# Altium PCB MiniFrogFC_v1.PcbDoc
Units mm, origin at the board's own origin, x right, y up, seen from the top; angles counter-clockwise.
Board outline 26.73 x 18 mm, 4 copper layers (Top Layer, Middle Layer 1, Middle Layer 2, Bottom Layer), stack 0.568 mm thick; 86 components, 49 nets, 293 pads, 42 vias.
Unrouted connection lines stored in the file: 2.
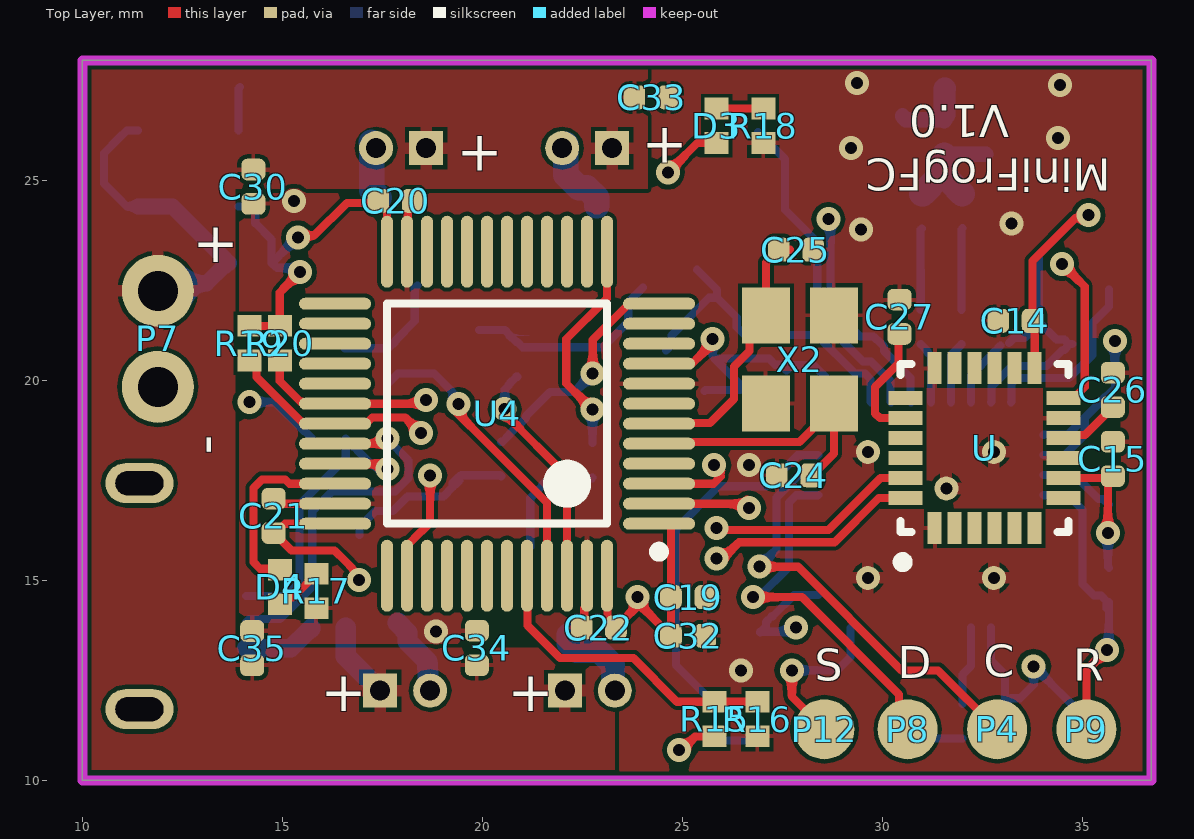
[diagram p0: Top Layer view]
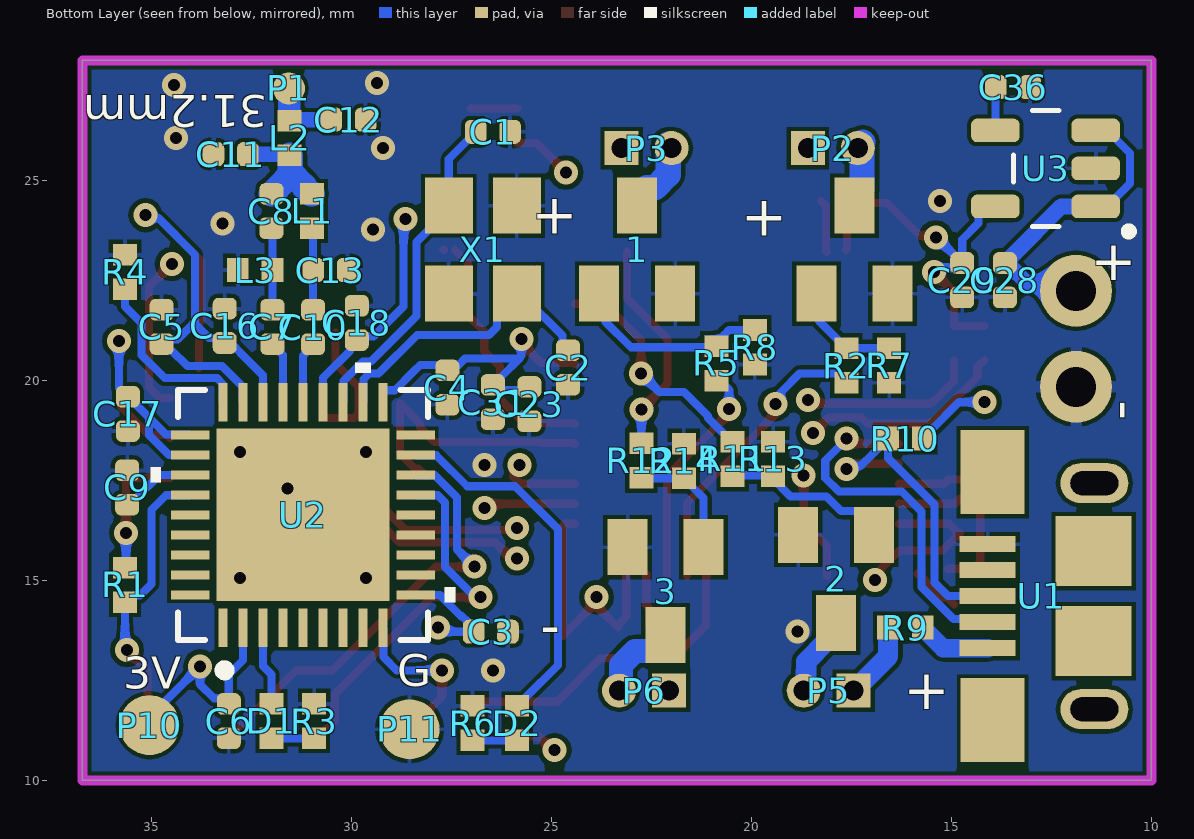
[diagram p1: Bottom Layer view, seen from below]
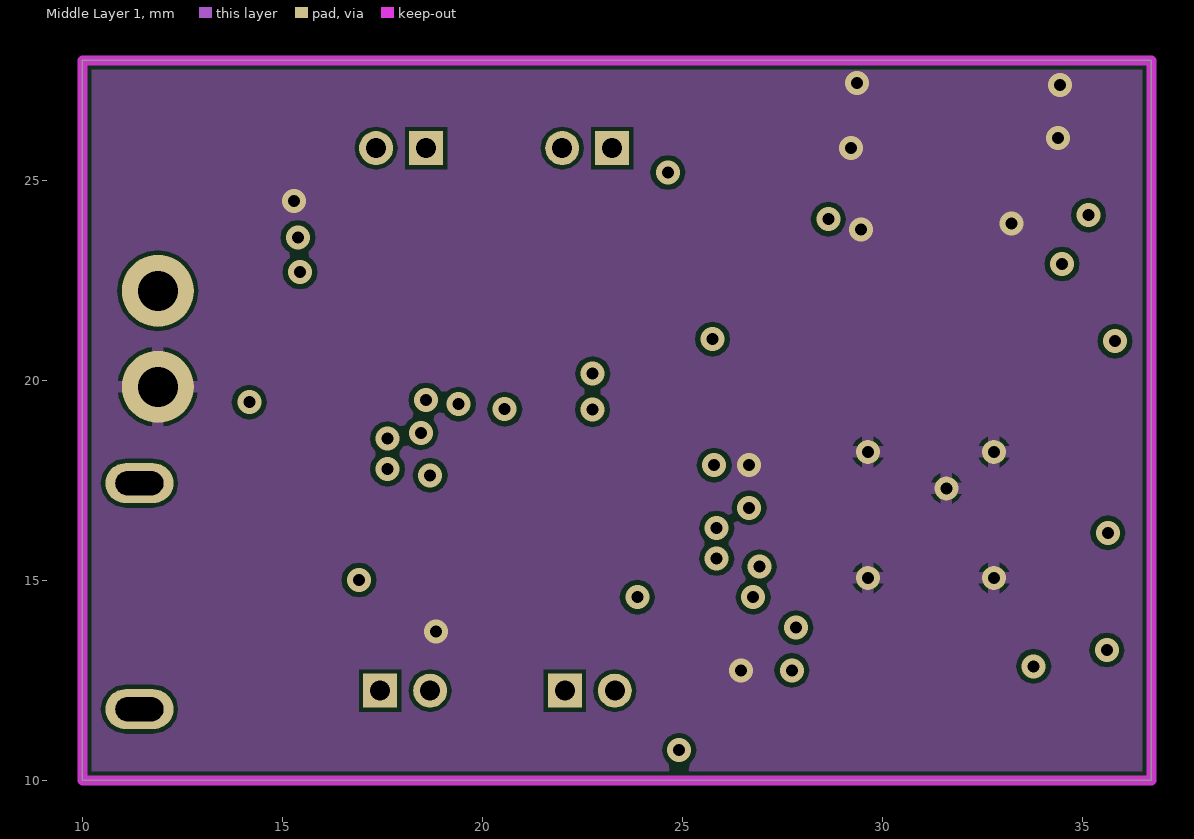
[diagram p2: Middle Layer 1]
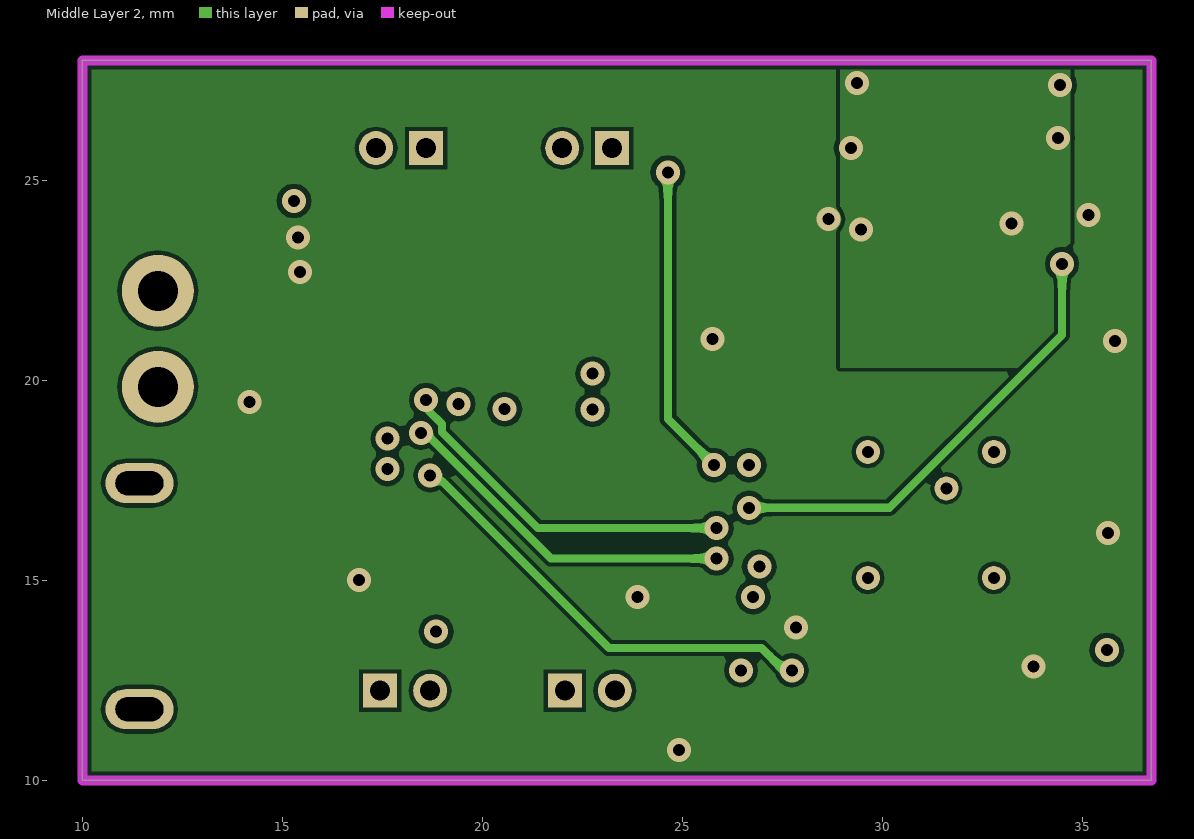
[diagram p3: Middle Layer 2]
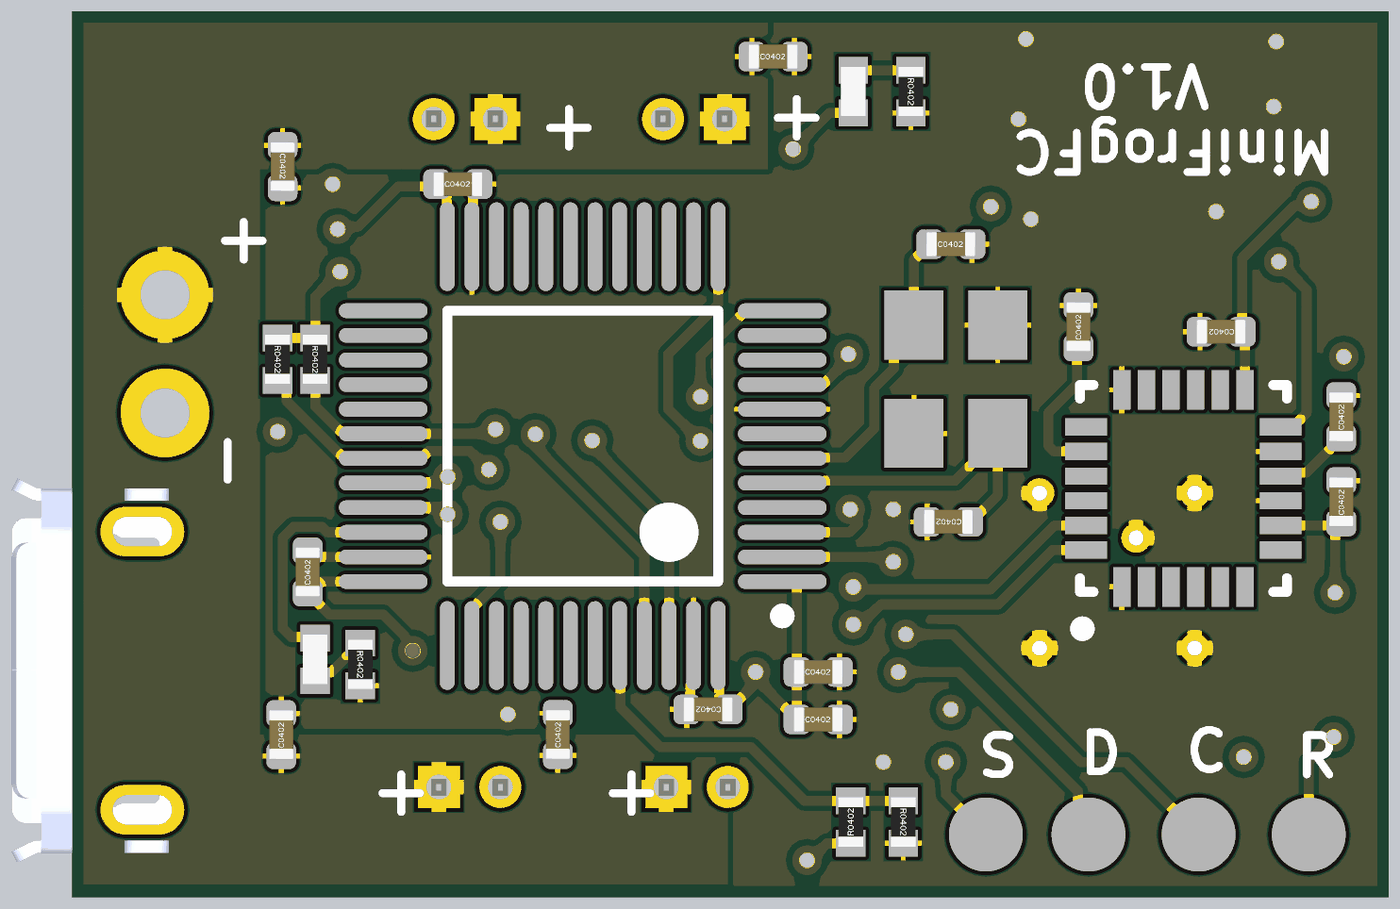
[diagram p4: 3D render of the assembled board from above, using the file's embedded part models]
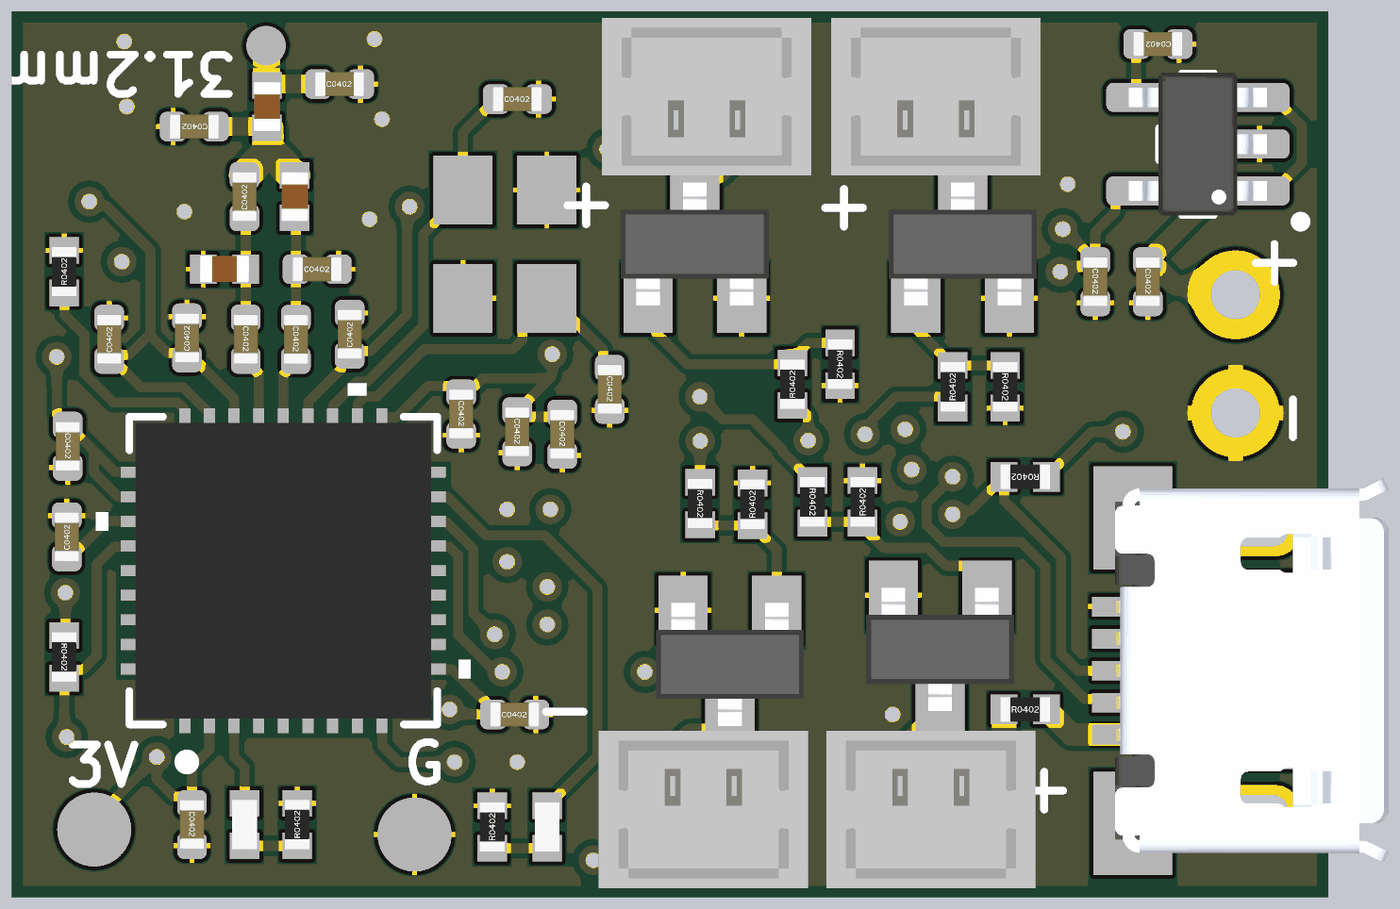
[diagram p5: 3D render of the assembled board from below, using the file's embedded part models]

## Layer stack, top to bottom
Top Solder: solder mask 0.0102, Solder Resist, Dk 3.5
Top Layer: signal copper 0.0356
Dielectric 2: prepreg 0.0711, PP-006, Dk 4.1
Middle Layer 1: signal copper 0.0175
Dielectric 1: core 0.32, FR-4, Dk 4.8
Middle Layer 2: signal copper 0.0175
Dielectric 3: prepreg 0.0711, PP-006, Dk 4.1
Bottom Layer: signal copper 0.0356
Bottom Solder: solder mask 0.0102, Solder Resist, Dk 3.5

## Board outline
10,10 36.728,10 36.728,28 10,28

## Design rules (kind name [scope] priority, off if disabled: settings)
BoardOutlineClearance [All] p1: gap=0.2 ignorepadtopadclearanceinfootprint=FALSE
Clearance [All] p1: gap=0.102 ignorepadtopadclearanceinfootprint=FALSE except(0.127: Arc-Via Track-Via SMDPad-Via THPad-Via Via-Via Via-Fill Via-Poly Via-Region Via-Text; 0.25: Arc-Hole Track-Hole SMDPad-Hole THPad-Hole Via-Hole Fill-Hole Poly-Hole Region-Hole Text-Hole)
ComponentClearance [All] p1: gap=0.102 collisioncheckmode=3 verticalgap=0.102 showdistances=TRUE
DiffPairsRouting [All] p1: maxlimit=0.102 minlimit=0.102 mostfreqgap=0.102 toplayer_minwidth=0.102 toplayer_maxwidth=1816.048 toplayer_prefwidth=0.102 midlayer1_minwidth=0.102 midlayer1_maxwidth=1816.048 midlayer1_prefwidth=0.102 midlayer2_minwidth=0.102 midlayer2_maxwidth=1816.048 midlayer2_prefwidth=0.102 bottomlayer_minwidth=0.102 bottomlayer_maxwidth=1816.048 bottomlayer_prefwidth=0.102 maxuncoupledlength=12.7
Height [All] p1: minheight=0 maxheight=1816.048 prefheight=12.7
HoleSize [All] p1: absolutevalues=TRUE maxlimit=6.3 minlimit=0.2 maxpercent=80.000 minpercent=20.000
HoleToHoleClearance [All] p1: gap=0.25 allowstackedmicrovias=FALSE
MinimumAnnularRing [All] p1: minimumring=0.076
MinimumSolderMaskSliver [All] p1: minsoldermaskwidth=0
PlaneClearance [All] p1: clearance=0.102
PlaneConnect PlaneConnectPowerPads [InPadClass('PowerPads')] p1: planeconnectstyle=Direct reliefexpansion=0.508 reliefentries=4 reliefconductorwidth=0.254 reliefairgap=0.254
PlaneConnect [All] p2: pad.planeconnectstyle=Relief pad.reliefexpansion=0.3 pad.reliefentries=4 pad.reliefconductorwidth=0.102 pad.reliefairgap=0.102 via.planeconnectstyle=Direct via.reliefexpansion=0.3 via.reliefentries=4 via.reliefconductorwidth=0.127 via.reliefairgap=0.127
PolygonConnect PolygonConnectPowerPads [All vs (InPadClass('PowerPads'))] p1: connectstyle=Direct reliefconductorwidth=0.254 reliefentries=4 polygonreliefangle="90 Angle" airgapwidth=0.254
PolygonConnect [All] p2: thpad.connectstyle=Relief thpad.reliefconductorwidth=0.3 thpad.reliefentries=4 thpad.polygonreliefangle="90 Angle" thpad.airgapwidth=0.102 smdpad.connectstyle=Relief smdpad.reliefconductorwidth=0.102 smdpad.reliefentries=4 smdpad.polygonreliefangle="90 Angle" smdpad.airgapwidth=0.102 via.connectstyle=Direct via.reliefconductorwidth=0.127 via.reliefentries=4 via.polygonreliefangle="90 Angle" via.airgapwidth=0.127
RoutingVias [All] p1: holewidth=0.2 width=0.45 viastyle="Through Hole" minholewidth=0.2 minwidth=0.45 maxholewidth=6.3 maxwidth=6.55
SilkToSilkClearance [All] p1: silktosilkclearance=0
SilkToSolderMaskClearance [IsPad] p1: minsilkscreentomaskgap=0.102 clearancetoexposedcopper=TRUE
SolderMaskExpansion [All] p1: expansion=0.075 istentingtop=FALSE
Width [All] p1: maxlimit=1816.048 minlimit=0.102 preferedwidth=0.102
20 further rules are at their usual default settings.

## Classes and differential pairs
component class Receiver: C1 C2 C3 C4 C5 C6 C7 C8 C9 C10 C11 C12 C13 C16 C17 C18 D1 D2 L1 L2 L3 P1 P4 P8 P9 P10 P11 P12 R1 R3 R4 R6 U2 X1
component class Power: C28 C29 C30 C33 C34 C35 C36 P7 U3
component class MCU: 1 2 3 C19 C20 C21 C22 C23 C24 C25 C31 C32 D3 D4 P2 P3 P5 P6 R2 R5 R7 R8 R9 R10 R11 R12 R13 R14 R15 R16 R17 R18
component class IMU: C14 C15 C26 C27 R19 R20 U

## Components (designator, comment, footprint, x,y, rotation, side; value= is the part's Value field where it differs from the comment)
1 "AO3416" SOT23-3 22.86,23.266 r180 bottom
2 "AO3416" SOT23-3 17.882,15.037 r0 bottom
3 "AO3416" SOT23-3 22.149,14.732 r0 bottom
C1 "12pF" "0402 Capacitor Generic" 26.464,26.213 r180 bottom
C2 "12pF" "0402 Capacitor Generic" 24.587,20.32 r270 bottom
C3 "100nF" "0402 Capacitor Generic" 26.518,13.716 r180 bottom
C4 "220pF" "0402 Capacitor Generic" 27.603,19.818 r270 bottom
C5 "220pF" "0402 Capacitor Generic" 34.747,21.336 r90 bottom
C6 "1uF" "0402 Capacitor Generic" 33.068,11.481 r270 bottom
C7 "100pF" "0402 Capacitor Generic" 31.976,21.336 r270 bottom
C8 "1pF" "0402 Capacitor Generic" 32.001,24.232 r90 bottom
C9 "1uF" "0402 Capacitor Generic" 35.608,17.323 r90 bottom
C10 "100pF" "0402 Capacitor Generic" 30.96,21.334 r270 bottom
C11 "1p8" "0402 Capacitor Generic" 33.02,25.654 r0 bottom
C12 "1p5" "0402 Capacitor Generic" 30.074,26.518 r180 bottom
C13 "1pF" "0402 Capacitor Generic" 30.528,22.758 r180 bottom
C14 "0.1uF" "0402 Capacitor Generic" 33.325,21.488 r180 top
C15 "10nF" "0402 Capacitor Generic" 35.763,18.034 r90 top
C16 "100nF" "0402 Capacitor Generic" 33.17,21.364 r90 bottom
C17 "100nF" "0402 Capacitor Generic" 35.59,19.162 r270 bottom
C18 "100nF" "0402 Capacitor Generic" 29.868,21.438 r90 bottom
C19 "100nF" "0402 Capacitor Generic" 25.146,14.58 r0 top
C20 "100nF" "0402 Capacitor Generic" 17.831,24.486 r0 top
C21 "100nF" "0402 Capacitor Generic" 14.783,16.612 r90 top
C22 "100nF" "0402 Capacitor Generic" 22.911,13.818 r180 top
C23 "10nF" "0402 Capacitor Generic" 25.552,19.406 r270 bottom
C24 "20 pF" "0402 Capacitor Generic" 27.788,17.628 r180 top
C25 "20pF" "0402 Capacitor Generic" 27.838,23.266 r0 top
C26 "0.1uF" "0402 Capacitor Generic" 35.763,19.761 r90 top
C27 "2.2nF" "0402 Capacitor Generic" 30.429,21.59 r90 top
C28 "1uF" "0402 Capacitor Generic" 13.665,22.504 r270 bottom
C29 "4.7uF" "0402 Capacitor Generic" 14.732,22.504 r270 bottom
C30 "10u" "0402 Capacitor Generic" 14.275,24.841 r270 top
C31 "1uF" "0402 Capacitor Generic" 26.467,19.456 r270 bottom
C32 "4.7uF" "0402 Capacitor Generic" 25.146,13.614 r0 top
C33 "10u" "0402 Capacitor Generic" 24.232,27.076 r0 top
C34 "10u" "0402 Capacitor Generic" 19.863,13.31 r90 top
C35 "10u" "0402 Capacitor Generic" 14.247,13.305 r90 top
C36 "0.01uF" "0402 Capacitor Generic" 13.462,27.33 r0 bottom
D1 "Green LED" "0402 LED Generic" 32.001,11.481 r90 bottom
D2 "Red LED" "0402 LED Generic" 25.857,11.43 r90 bottom
D3 "LED" "0402 LED Generic" 25.857,26.365 r270 top
D4 "LED" "0402 LED Generic" 14.935,14.834 r90 top
L1 "1.2nH" "0402 Inductor Generic" 30.985,24.232 r90 bottom
L2 "1.2nH" "0402 Inductor Generic" 31.547,26.06 r90 bottom
L3 "1.2nH" "0402 Inductor Generic" 32.408,22.758 r0 bottom
P1 "RX antenna" "Antenna pad" 31.565,27.297 r180 bottom
P2 "Motor_out" MOLEX_530470210 17.968,25.806 r0 bottom
P3 "Motor_out" MOLEX_530470210 22.621,25.806 r0 bottom
P4 "RX Output_Single" "1 Solder Pad" 32.868,11.278 r0 top
P5 "Motor_out" MOLEX_530470210 18.069,12.243 r180 bottom
P6 "Motor_out" MOLEX_530470210 22.686,12.243 r180 bottom
P7 "Batt_in" "2 Solder Pads" 11.887,21.039 r0 top
P8 "RX Output_Single" "1 Solder Pad" 30.632,11.278 r0 top
P9 "RX Output_Single" "1 Solder Pad" 35.103,11.278 r0 top
P10 "RX Output_Single" "1 Solder Pad" 35.052,11.379 r90 bottom
P11 "RX Output_Single" "1 Solder Pad" 28.55,11.278 r180 bottom
P12 "RX Output_Single" "1 Solder Pad" 28.55,11.278 r90 top
R1 "10k" "0402 Resistor Generic" 35.662,14.884 r270 bottom
R2 "100R" "0402 Resistor Generic" 17.628,20.371 r90 bottom
R3 "1k" "0402 Resistor Generic" 30.934,11.481 r90 bottom
R4 "56k" "0402 Resistor Generic" 35.662,22.708 r90 bottom
R5 "100R" "0402 Resistor Generic" 20.879,20.422 r90 bottom
R6 "1k" "0402 Resistor Generic" 26.975,11.43 r90 bottom
R7 "10k" "0402 Resistor Generic" 16.561,20.371 r270 bottom
R8 "10k" "0402 Resistor Generic" 19.914,20.828 r270 bottom
R9 "DNP" "0402 Resistor Generic" 16.154,13.818 r180 bottom
R10 "1k5" "0402 Resistor Generic" 16.154,18.542 r0 bottom
R11 "100R" "0402 Resistor Generic" 20.472,18.034 r270 bottom
R12 "100R" "0402 Resistor Generic" 22.754,17.999 r270 bottom
R13 "10k" "0402 Resistor Generic" 19.456,18.034 r90 bottom
R14 "10k" "0402 Resistor Generic" 21.692,17.983 r90 bottom
R15 "DNP" "0402 Resistor Generic" 25.806,11.532 r90 top
R16 "10k" "0402 Resistor Generic" 26.873,11.532 r270 top
R17 "1k" "0402 Resistor Generic" 15.85,14.732 r270 top
R18 "1k" "0402 Resistor Generic" 27.026,26.365 r270 top
R19 "10k" "0402 Resistor Generic" 14.173,20.93 r270 top
R20 "10k" "0402 Resistor Generic" 14.935,20.93 r270 top
U "MPU-6050" MPU-6050 32.559,18.307 r90 top
U1 "Micro_USB" U254-051T-4BH83-F1S 14.097,14.605 r90 bottom
U2 "CC2510F16RHHR" CC2510F32RHHR 31.214,16.637 r90 bottom
U3 "LP2985AIM5-3.0/NOPB" SOT-23 12.649,25.298 r0 bottom
U4 "STM32F303CCT6" STM-LQFP48_N 20.367,19.166 r180 top
X1 "26 Mhz X1E0000210149" TSX-3225 26.718,23.266 r270 bottom
X2 "8 Mhz" TSX-3225 27.94,20.523 r90 top
? "AO3416" SOT23-3 17.424,23.266 r180 bottom

## Footprints (in the part's own frame and the unit in brackets; to place one, negate y for a bottom-side part, rotate by r counter-clockwise, add the part's x,y. Pads: shape width x height; smd on the part's side, far side on the other; paste and mask are expansions set on the pad)
"1 Solder Pad" [mm]
  round 1.5 smd: 1(0,0)
"2 Solder Pads" [mm]
  round 1.8 hole 1: 1(0,1.2) 2(0,-1.2)
"0402 Capacitor Generic" [mm]
  rrect53% 0.54x0.6 smd: 1(-0.43,0) 2(0.43,0)
  body extent -0.5,-0.25 0.5,0.25, height 0.5
"0402 Inductor Generic" [mm]
  rect 0.54x0.6 smd: 1(-0.432,0) 2(0.432,0)
  body extent -0.5,-0.28 0.5,0.27, height 0.5
"0402 LED Generic" [mm]
  rect 0.54x0.6 smd: 1(-0.432,0) 2(0.432,0)
  body extent -0.5,-0.25 0.5,0.25, height 0.5
"0402 Resistor Generic" [mm]
  rect 0.54x0.6 smd: 1(-0.432,0) 2(0.432,0)
  body extent -0.5,-0.25 0.5,0.25, height 0.32
"Antenna pad" [mm]
  round 0.8 smd: 1(0,0)
CC2510F32RHHR [mm]
  rect 0.96x0.225 smd paste+0 mask+0: 1(-2.817,2) 2(-2.817,1.5) 3(-2.817,1) 4(-2.817,0.5) 5(-2.817,0) 6(-2.817,-0.5) 7(-2.817,-1) 8(-2.817,-1.5) 9(-2.817,-2) 19(2.817,-2) 20(2.817,-1.5) 21(2.817,-1) 22(2.817,-0.5) 23(2.817,0) 24(2.817,0.5) 25(2.817,1) 26(2.817,1.5) 27(2.817,2)
  rect 0.225x0.96 smd paste+0 mask+0: 10(-2,-2.817) 11(-1.5,-2.817) 12(-1,-2.817) 13(-0.5,-2.817) 14(0,-2.817) 15(0.5,-2.817) 16(1,-2.817) 17(1.5,-2.817) 18(2,-2.817) 28(2,2.817) 29(1.5,2.817) 30(1,2.817) 31(0.5,2.817) 32(0,2.817) 33(-0.5,2.817) 34(-1,2.817) 35(-1.5,2.817) 36(-2,2.817)
  rect 4.318x4.318 smd paste-2.146 mask-2.146: 37(0,0)
  round 0.6 hole 0.3: V(-1.575,-1.575) V(-1.575,1.575) V(1.575,-1.575) V(1.575,1.575) ""(0.663,0.386)
  silkscreen extent -4.01,-3.81 3.81,3.81, body extent -3,-3 3,3, height 1
MOLEX_530470210 [mm]
  rect 0.85x0.85 hole 0.5 mask+0.076: 1(0.625,0)
  round 0.85 hole 0.5 mask+0.076: 2(-0.625,0)
  body extent -2.12,-2.06 2.12,1.14, height 4.4
MPU-6050 [mm] "QFN, 24-Leads, Body 4.00x4.00mm, Pitch 0.50mm, Thermal Pad 2.7x2.6mm"
  rect 0.8x0.35 smd: 1(-2,1.25) 2(-2,0.75) 3(-2,0.25) 4(-2,-0.25) 5(-2,-0.75) 6(-2,-1.25) 13(2,-1.25) 14(2,-0.75) 15(2,-0.25) 16(2,0.25) 17(2,0.75) 18(2,1.25)
  rect 0.35x0.85 smd: 7(-1.25,-1.975) 8(-0.75,-1.975) 9(-0.25,-1.975) 10(0.25,-1.975) 11(0.75,-1.975) 12(1.25,-1.975) 19(1.25,1.975) 20(0.75,1.975) 21(0.25,1.975) 22(-0.25,1.975) 23(-0.75,1.975) 24(-1.25,1.975)
  silkscreen extent -2.97,-2.1 2.1,2.17, body extent -2,-2 2,2, height 0.95
SOT23-3 [mm]
  rect 1x1.4 smd: 1(-0.95,-1.1) 2(0.95,-1.1) 3(0,1.1)
  body extent -1.5,-1.25 1.5,1.25, height 1.1
SOT-23 [mm]
  rrect50% 1.21x0.59 smd: 1(-1.255,0.95) 2(-1.255,0) 3(-1.255,-0.95) 4(1.255,-0.95) 5(1.255,0.95)
  silkscreen extent -2.18,-1.45 0.8,1.67, body extent -1.4,-1.45 1.4,1.45, height 1.45
STM-LQFP48_N [mm] "QFP, 48-Leads, Body 7x7mm, Pitch 0.5mm, IPC Medium Density"
  oval 1.8x0.3 smd: 1(-4.05,2.75) 2(-4.05,2.25) 3(-4.05,1.75) 4(-4.05,1.25) 5(-4.05,0.75) 6(-4.05,0.25) 7(-4.05,-0.25) 8(-4.05,-0.75) 9(-4.05,-1.25) 10(-4.05,-1.75) 11(-4.05,-2.25) 12(-4.05,-2.75) 25(4.05,-2.75) 26(4.05,-2.25) 27(4.05,-1.75) 28(4.05,-1.25) 29(4.05,-0.75) 30(4.05,-0.25) 31(4.05,0.25) 32(4.05,0.75) 33(4.05,1.25) 34(4.05,1.75) 35(4.05,2.25) 36(4.05,2.75)
  oval 0.3x1.8 smd: 13(-2.75,-4.05) 14(-2.25,-4.05) 15(-1.75,-4.05) 16(-1.25,-4.05) 17(-0.75,-4.05) 18(-0.25,-4.05) 19(0.25,-4.05) 20(0.75,-4.05) 21(1.25,-4.05) 22(1.75,-4.05) 23(2.25,-4.05) 24(2.75,-4.05) 37(2.75,4.05) 38(2.25,4.05) 39(1.75,4.05) 40(1.25,4.05) 41(0.75,4.05) 42(0.25,4.05) 43(-0.25,4.05) 44(-0.75,4.05) 45(-1.25,4.05) 46(-1.75,4.05) 47(-2.25,4.05) 48(-2.75,4.05)
  silkscreen extent -4.18,-2.75 2.75,3.57, body extent -3.5,-3.5 3.5,3.5, height 1.6
TSX-3225 [mm] "SMD, 4-Leads, Body 3.2x2.5mm"
  rect 1.4x1.2 smd: 1(-1.1,-0.85) 2(1.1,-0.85) 3(1.1,0.85) 4(-1.1,0.85)
  body extent -1.6,-1.25 1.6,1.25, height 0.8
U254-051T-4BH83-F1S [mm]
  rect 0.4x1.4 smd: 1(-1.3,0) 2(-0.65,0) 3(0,0) 4(0.65,0) 5(1.3,0)
  rect 2.1x1.6 smd: S1(-3.1,-0.125) S2(3.1,-0.125)
  rect 1.75x1.9 smd: S3(-1.125,-2.65) S4(1.125,-2.65)
  oval 1x1.7 hole 0.6 slot 1.2 at 90 deg: S5(-2.825,-2.67) S6(2.825,-2.67)
  body extent -3.9,-5.31 3.9,0.24, height 2.7

## Part data
1 2 3 ?: "N-Channel 20V 6.5A _Ta_ 1.4W _Ta_ Surface Mount SOT-23-3L", Package="SOT-23 Alpha &amp; Omega Semiconductor", Digi-Key_Part_Number=785-1011-1-ND, Digi-Key_Purchase_URL=https://www.digikey.com/product-detail/en/alpha-omega-semiconductor-inc/AO3416/785-1011-1-ND/1855953?utm_source=snapeda&utm_medium=aggregator&utm_campaign=symbol, MF="Alpha &", MP=AO3416, SnapEDA_Link=https://www.snapeda.com/parts/AO3416/Alpha%20%26%20Omega%20Semiconductor%20Inc./view-part/555673/?ref=snap
C1 C2 C3 C4 C5 C6 C7 C8 C9 C10 C11 C12 C13 C14 C15 C16 C17 C18 C19 C20 C21 C22 C23 C24 C25 C26 C27 C28 C29 C30 C31 C32 C33 C34 C35 C36: library part "0402 Ceramic Capacitor", "Generic 0402 Ceramic Capacitor", Package="1005 Yageo", DigiKey-Purchase-URL=https://snapeda.com/shop?store=DigiKey&id=940461, MF=Yageo, Mouser-Purchase-URL=https://snapeda.com/shop?store=Mouser&id=940461, MP=AC0402FR-071ML, SnapEDA_Link=https://www.snapeda.com/parts/AC0402FR-071ML/Yageo/view-part/940461/?ref=snap
D1 D2 D3 D4: library part "0402 Generic LED", "0402 Generic LED"
L1 L2 L3: library part "0402 Generic Inductor", "0402 Generic Inductor"
P1: library part "Generic Antenna"
R1 R2 R3 R4 R5 R6 R7 R8 R10 R11 R12 R13 R14 R15 R16 R17 R18 R19 R20: library part "0402 Generic Resistor", "Generic 0402 Resistor"
R9: library part "0402 Generic Resistor", "Do Not Place"
U: "Accelerometer, Gyroscope, 6 Axis Sensor IÂ²C Output", Package="VFQFN-24 TDK InvenSense", Availability=Unavailable, MF="TDK InvenSense", MP=MPU-6050, Price=None, SnapEDA_Link=https://www.snapeda.com/parts/MPU-6050/TDK%20InvenSense/view-part/4503180/?ref=snap
U1: "XKB Connectivity U254-051T-4BH83-F1S"
U2: "VQFN-36 RF Transceiver ICs", Manufacturer_Part_Number=CC2510F16RHHR, RefDes=RefDes, SourceLibrary=TI_2019-05-10, Type=DEV, Vendor="Texas Instruments"
U3: "Fixed 3V LDO (16V MAX) 150mA SOT-23-5 Linear Voltage Regulator"
U4: "MCU 32-bit STM32F ARM Cortex M4 RISC 256KB Flash 2.5V/3.3V 48-Pin LQFP Tray", Case/Package=LQFP, Frequency=72MHz, Manufacturer=STMicroelectronics, Max Operating Temperature=85°C, Max Supply Voltage=3.6V, Min Operating Temperature=-40°C, Min Supply Voltage=2V, Package Quantity=250, Supplier Part Number 1=497-13318-ND, Category=Microcontrollers, ComponentLink1Description=https://datasheet.ciiva.com/14666/0900766b81171360-14666656.pdf?src-supplier=RSComponents, ComponentLink1URL=https://datasheet.ciiva.com/14666/0900766b81171360-14666656.pdf?src-supplier=RSComponents, ComponentLink2Description=https://datasheet.ciiva.com/8055/1831499-8055015.pdf?src-supplier=Element14, ComponentLink2URL=https://datasheet.ciiva.com/8055/1831499-8055015.pdf?src-supplier=Element14, Contact Plating=Gold, Core Architecture=ARM, Data Bus Width=32b, Height=1.45mm, Interface=I2C,SPI,USB,CAN,IrDA,UART,USART,LIN,I2S, Lead Free="Lead Free", Length=10mm, Manufacturer Part Number=STM32F303CCT6, Max Frequency=72MHz, Memory Size=256KB, Memory Type=FLASH, Number of ADC Channels=39, Number of I2C Channels=2, Number of I/Os=37, Number of Pins=48, Number of Programmable I/O=27, Number of SPI Channels=3, Number of Timers/Counters=10, Number of USB Channels=1, Oscillator Type=Internal, Packaging=Tray, Peripherals=POR,PWM,WDT,DMA, Pricing 1="1=6.33000, 10=5.68700, 25=5.37600, 100=4.65930, 250=4.42040, 500=3.96640, 1000=3.34516, 2500=3.17790, 5000=3.05843 (USD)", Radiation Hardening=No, RAM Size=40KB, REACH SVHC="No SVHC", RoHS=Yes, Stock 1=6096, Supplier 1=Digi-Key, Watchdog Timer=Yes, Width=7.2mm
X1: library part X1E0000210149, "26MHz ±10ppm 12pF 40Ω TSX-3225", Case/Package=SMD/SMT, ESR (Equivalent Series Resistance)=40R, Frequency=26MHz, Frequency Stability=10ppm, Load Capacitance=12pF, Manufacturer=Epson, Max Operating Temperature=75°C, Min Operating Temperature=-20°C, Category=Crystals, ComponentLink1Description=https://support.epson.biz/td/api/doc_check.php?dl=brief_FA-238V_en.pdf&src-supplier=Digi-Key, ComponentLink1URL=https://support.epson.biz/td/api/doc_check.php?dl=brief_FA-238V_en.pdf&src-supplier=Digi-Key, Frequency Tolerance=10ppm, Height=0.024inch, Length=0.126inch, Mount="Surface Mount", Packaging="Tape and Reel", Pricing 1="2000=0.17600 (USD)", RoHS=Yes, Supplier 1=Digi-Key, Width=0.098inch
X2: library part "XTY 7325-0800A2010-00", "8MHz ±10ppm 20pF 400Ω", ComponentLink1Description=https://support.epson.biz/td/api/doc_check.php?dl=brief_FA-238V_en.pdf&src-supplier=Digi-Key, ComponentLink1URL=https://support.epson.biz/td/api/doc_check.php?dl=brief_FA-238V_en.pdf&src-supplier=Digi-Key

## Via types
v1: diameter 0.6, hole 0.3, Top Layer to Bottom Layer, tented both sides, 42 vias

## Nets (pads, with @x,y where several pads share a name; then routed paths per layer and width w, separated by ;. In a path a pad name is that pad's centre, name@x,y a point inside that pad or via, vN(x,y) a via of type N, cw(c..) or ccw(c..) an arc to the next point about the centre after c; other vN are vias at no path point)
3V: C3.1 C4.1 C5.1 C6.1 C14.1 C15.1 C16.1 C17.1 C18.1 C19.1 C20.1 C21.1 C22.1 C23.1 C29.1 C31.1 C32.1 P10.1 R1.1 R10.1 R15.1 R19.1 R20.1 U2.2 U2.10 U2.19 U2.22 U2.25 U2.26 U2.28 U2.29 U3.5 U4.1 U4.9 U4.24 U4.36 U4.48 U.8 U.13 | length 69.7
  Top Layer w0.203: R19.1 R20.1 14.935,22.2 v1(15.443,22.708) ; C21.1 C21.1@14.79,16.182 ; v1(15.392,23.571) 15.439,23.618 15.795,23.618 16.612,24.435 C20.1@17.452,24.435 ; U4.36 15.069,16.416 14.835,16.182 C21.1@14.79,16.182 ; v1(16.916,15.01) 16.916,15.117 16.756,15.277 16.756,15.299 16.577,15.478 16.307,15.748 15.224,15.748 C21.1@14.79,16.182 ; C20.1 C20.1@17.452,24.435 ; C20.1@17.562,24.435 C20.1@17.452,24.435 ; U4.24@17.631,23.262 17.613,23.281 17.613,24.274 C20.1@17.452,24.435 ; U4.48@23.131,15.162 23.131,14.08 23.341,13.87 C22.1 23.341,13.825 23.532,14.016 23.539,14.016 23.876,14.353 v1(23.876,14.58) 23.952,14.504 23.952,14.378 24.518,13.813 24.525,13.813 C32.1@24.712,13.626 ; U4.1 24.667,16.416 24.712,16.371 24.712,14.584 C19.1 24.712,14.576 C32.1@24.712,13.626 ; U4.9 24.435,20.434 25.26,20.434 25.756,20.93 v1(25.756,21.031) ; C32.1 24.716,13.622 C32.1@24.712,13.626 ; v1(24.92,10.755) 24.979,10.755 25.321,11.097 25.803,11.097 R15.1 ; U.13 33.809,21.434 C14.1 33.755,22.985 34.824,24.054 35.078,24.054 v1(35.154,24.13) ; U.8 35.716,17.557 C15.1 ; v1@35.574,16.123 v1(35.638,16.187) C15.1@35.638,17.479
  Bottom Layer w0.203: U3.5 14.133,24.348 14.323,24.158 14.323,23.929 14.732,23.521 C29.1 ; v1(14.173,19.456) 14.808,19.456 15.524,18.74 15.554,18.74 15.722,18.572 R10.1 ; v1(15.443,22.708) 15.336,22.708 15.226,22.817 14.849,22.817 C29.1 ; v1@15.443,23.673 15.443,23.646 14.93,23.133 14.93,23.125 14.74,22.934 C29.1 ; C23.1@25.552,19.734 25.58,19.761 26.443,19.761 C31.1@26.467,19.785 ; v1(25.756,21.031) 25.756,20.625 25.832,20.549 26.066,20.549 26.073,20.542 27.165,20.542 27.317,20.391 27.461,20.391 C4.1 27.742,20.387 28.281,20.387 28.445,20.223 28.916,19.752 29.203,19.752 29.214,19.741 U2.19 ; 25.789,20.557 26.268,20.077 C31.1@26.459,19.886 ; C3.1@26.948,13.701 C3.1@26.963,13.716 ; C3.1 C3.1@26.963,13.716 ; v1@27.635,13.716 C3.1@26.963,13.716 ; U2.10 28.389,14.63 27.787,14.63 27.261,14.103 27.235,14.103 27.09,13.959 27.09,13.844 C3.1@26.963,13.716 ; v1(28.651,24.028) 28.651,24.181 28.702,24.232 28.702,21.844 29.448,21.098 29.777,21.098 C18.1 29.875,21.008 30.04,20.842 30.04,20.733 30.708,20.066 30.708,19.46 U2.22 ; U2.25 32.214,20.126 32.784,20.696 32.784,20.704 32.949,20.869 C16.1@32.957,20.869 ; U2.2 32.714,13.003 33.068,12.649 C6.1 33.209,12.051 33.438,12.051 33.786,12.399 v1@33.786,12.848 ; U2.26 32.725,19.465 32.725,19.845 33.238,20.359 34.104,20.359 34.508,20.763 34.552,20.763 C5.1@34.632,20.844 ; C16.1 33.292,21.057 33.558,21.057 33.911,21.41 33.911,23.141 34.824,24.054 35.078,24.054 v1(35.154,24.13) ; v1(33.782,12.852) v1@33.786,12.848 ; 33.911,21.461 34.351,21.021 34.552,21.021 34.632,20.94 34.632,20.906 C5.1 ; U2.29 34.559,18.137 35.059,18.637 35.059,19.061 ; U2.28 34.041,18.647 34.638,18.647 C17.1@35.392,19.401 ; P10.1 35.052,11.582 v1@33.786,12.848 ; 35.055,19.064 C17.1@35.392,19.401 ; v1(35.638,16.187) 35.638,15.34 R1.1 ; v1(35.814,20.98) 35.814,19.816 35.763,19.765 35.763,19.757 35.598,19.592 C17.1 35.583,19.592 C17.1@35.392,19.401
  other v1: 27.838,13.818
CLK: P4.1 U2.16 | length 10.8
  Top Layer w0.203: v1(26.924,15.342) 27.889,15.342 30.48,12.751 31.394,12.751 P4.1
  Bottom Layer w0.203: v1(26.924,15.342) 27.358,15.775 27.358,17.073 27.911,17.626 28.386,17.626 U2.16
Data: P8.1 U2.15 | length 9.2
  Top Layer w0.203: v1(26.772,14.58) 27.991,14.58 30.42,12.15 30.42,11.49 P8.1
  Bottom Layer w0.203: v1(26.772,14.58) 26.91,14.58 27.663,15.333 27.663,16.947 27.842,17.126 28.386,17.126 U2.15
ESC0: R2.1 U4.45 | length 7.5
  Top Layer w0.203: v1(19.406,19.406) 19.406,19.152 21.617,16.94 U4.45
  Bottom Layer w0.203: R2.1 17.658,19.939 17.886,20.168 18.796,20.168 19.257,19.706 19.257,19.661 19.406,19.513 v1(19.406,19.406)
ESC1: R5.1 U4.46 | length 5.8
  Top Layer w0.203: v1(20.56,19.279) 20.56,19.166 22.117,17.609 U4.46
  Bottom Layer w0.203: v1(20.56,19.279) 20.56,19.772 20.68,19.893 20.68,19.923 20.849,20.091 R5.1@20.879,20.091
ESC2: R11.1 U4.12 | length 5.9
  Top Layer w0.203: v1(22.758,20.168) 22.758,21.007 23.667,21.916 U4.12
  Bottom Layer w0.203: R11.1 20.502,18.466 20.671,18.634 20.671,18.643 21.088,19.06 21.088,19.107 21.692,19.71 22.301,19.71 v1(22.758,20.168)
ESC3: R12.1 U4.13 | length 5.6
  Top Layer w0.203: v1(22.754,19.269) 22.098,19.925 22.098,21.031 23.117,22.05 U4.13
  Bottom Layer w0.203: R12.1 v1@22.754,19.015 ; v1(22.754,19.269) v1@22.754,19.117 ; v1@22.754,19.015 v1@22.754,19.117 ; v1@22.754,19.015 22.804,19.066 v1@22.754,19.117
GND: 1.2 2.2 3.2 ?.2 C1.2 C2.2 C3.2 C4.2 C5.2 C6.2 C9.2 C11.2 C12.2 C13.2 C14.2 C15.2 C16.2 C17.2 C18.2 C19.2 C20.2 C21.2 C22.2 C23.2 C24.2 C25.2 C26.2 C27.2 C28.2 C29.2 C30.2 C31.2 C32.2 C33.2 C34.2 C35.2 C36.1 L3.2 P7.2 P11.1 R3.2 R4.2 R6.2 R7.2 R8.2 R13.2 R14.2 R16.2 R17.2 R18.2 U1.5 U2.37 U3.2 U4.8 U4.23 U4.35 U4.47 U.1 U.9 U.11 U.18 X1.2 X1.4 X2.2 X2.4 | length 4.3
  Top Layer w0.203: C21.2 14.909,16.916 U4.35 ; U4.23 18.135,23.234 18.135,24.36 C20.2 ; C22.2 22.548,13.885 22.548,14.303 22.631,14.386 U4.47@22.631,15.162
  other v1: 26.467,12.751 18.847,13.716 26.67,17.882 29.464,23.774 33.223,23.927 15.291,24.486 29.21,25.806 34.392,26.06 34.442,27.381 29.362,27.432
MCU_XTAL1: C24.1 U4.5 X2.1 | length 6.9
  Top Layer w0.203: U4.5 24.435,18.434 25.254,18.434 25.282,18.462 27.929,18.462 28.292,18.825 28.292,18.925 X2.1 ; C24.1@28.167,17.628 28.167,17.635 28.332,17.8 28.418,17.8 28.79,18.173 X2.1@28.79,19.323
MCU_XTAL2: C25.1 U4.6 X2.3 | length 6.3
  Top Layer w0.203: U4.6 24.435,18.934 25.691,18.934 26.287,19.53 26.287,20.343 26.681,20.737 26.681,21.214 X2.3 27.09,22.949 27.235,23.094 27.243,23.094 27.408,23.259 C25.1 ; 27.692,23.263 27.692,23.271
Net1_1: 1.1 R5.2 R8.1 | length 5.2
  Bottom Layer w0.203: R8.1 20.561,21.26 20.68,21.141 20.68,21.124 20.849,20.955 20.879,20.955 21.006,20.828 23.012,20.828 23.646,21.461 23.646,21.951 1.1@24.013,22.319
Net1_3: 1.3 P3.2 | length 2
  Bottom Layer w0.635: P3.2@22.083,25.908 22.083,25.144 22.414,24.812 22.614,24.812 22.86,24.566 1.3
Net2_1: 2.1 R11.2 R13.1 | length 4.5
  Bottom Layer w0.203: 2.1 16.932,16.337 17.33,16.735 17.761,16.735 18.125,17.099 19.025,17.099 19.258,17.332 R13.1@19.264,17.332 ; R13.1@19.258,17.404 19.258,17.434 19.379,17.554 19.426,17.602 19.433,17.602 R13.1 19.482,17.628 20.447,17.628 R11.2 ; R13.1@19.312,17.38 R13.1@19.433,17.5
Net2_3: 2.3 P5.2 | length 2
  Bottom Layer w0.508: 2.3 18.128,13.691 18.128,13.472 18.629,12.971 18.629,12.308 P5.2
Net3_1: 3.1 R12.2 R14.1 | length 3
  Bottom Layer w0.203: 3.1 21.199,17.058 21.493,17.353 21.493,17.383 21.662,17.551 R14.1 22.738,17.551 R12.2
Net3_3: 3.3 P6.2 | length 2.2
  Bottom Layer w0.6: 3.3 22.149,13.432 22.349,13.232 22.911,13.232 23.263,12.881 23.263,12.291 P6.2
Net_1: ?.1 R2.2 R7.1 | length 3
  Bottom Layer w0.203: R7.1 R2.2 17.658,20.803 17.826,20.971 17.826,21.001 18.309,21.484 18.309,22.304 ?.1@18.374,22.37
Net_3: ?.3 P2.2 | length 1.5
  Bottom Layer w0.635: P2.2@17.221,25.959 17.238,25.942 17.238,24.756 ?.3@17.424,24.57
NetC7_1: C7.1 C8.1 L3.1 | length 2
  Bottom Layer w0.203: C7.1 L3.1 31.976,23.776 C8.1
NetC8_2: C8.2 C11.1 L1.2 L2.1 | length 3
  Bottom Layer w0.381: L2.1 31.572,25.654 C11.1
  Bottom Layer w0.635: L1.2 31.015,24.664 31.184,24.832 31.184,24.862 31.527,25.205 ; L2.1 31.527,25.608 31.527,25.205 ; C8.2 31.994,24.662 31.828,24.827 31.828,24.834 31.544,25.119 31.544,25.222 31.527,25.205
NetC9_1: C9.1 U2.30 | length 1.9
  Bottom Layer w0.203: U2.30 34.805,17.637 35.406,17.036 35.516,17.036 C9.1@35.659,16.893
NetC10_1: C10.1 C13.1 L1.1 | length 2
  Bottom Layer w0.203: C10.1 30.96,22.757 C13.1 30.958,23.772 L1.1
NetC12_1: C12.1 L2.2 P1.1 | length 1.8
  Bottom Layer w0.381: C12.1@30.501,26.619 30.501,26.597 30.58,26.518 31.522,26.518 L2.2
  Bottom Layer w0.559: L2.2@31.518,26.619 L2.2@31.544,26.645 ; L2.2@31.545,26.645 31.554,26.654 31.554,27.287 P1.1
NetC26_1: C26.1 U.10 | length 1.6
  Top Layer w0.203: U.10 34.534,18.612 34.552,18.63 35.062,18.63 35.59,19.158 35.59,19.166 35.756,19.331 C26.1
NetC27_1: C27.1 U.20 | length 3.1
  Top Layer w0.203: C27.1@30.401,21.195 30.401,20.419 29.82,19.838 29.82,19.176 29.939,19.057 U.20
NetC36_2: C36.2 U3.4 | length 1.1
  Bottom Layer w0.203: U3.4 13.904,27.292 C36.2@13.943,27.33
NetD1_1: D1.1 R3.1 | length 1.1
  Bottom Layer w0.203: R3.1 D1.1
NetD1_2: D1.2 U2.3 | length 2
  Bottom Layer w0.203: D1.2 32.001,12.649 32.214,12.862 U2.3
NetD2_1: D2.1 R6.1 | length 1.1
  Bottom Layer w0.203: D2.1 R6.1
NetD2_2: D2.2 U2.17 | length 9.2
  Bottom Layer w0.203: D2.2 25.827,11.862 25.659,12.03 25.659,12.06 24.841,12.878 24.841,16.286 25.908,17.353 27.107,17.353 27.88,18.126 28.386,18.126 U2.17
NetD3_1: D3.1 R18.1 | length 1.2
  Top Layer w0.203: D3.1 R18.1
NetD3_2: D3.2 U4.3 | length 11.8
  Top Layer w0.203: U4.3 25.779,17.416 25.959,17.595 25.906,17.648 25.959,17.7 25.795,17.864 v1(25.795,17.882) ; v1(24.638,25.197) 25.371,25.93 25.854,25.93 D3.2
  Middle Layer 2 w0.203: v1(24.638,25.197) 24.638,19.038 25.908,17.768 25.959,17.819 25.896,17.882 v1(25.795,17.882)
NetD4_1: D4.1 R17.1 | length 1.2
  Top Layer w0.203: D4.1 15.104,14.57 15.256,14.57 15.651,14.966 15.651,14.996 15.82,15.164 R17.1
NetD4_2: D4.2 U4.34 | length 4.9
  Top Layer w0.203: D4.2@15.101,15.291 14.445,15.291 14.28,15.456 14.28,17.312 14.494,17.526 15.072,17.526 15.182,17.416 U4.34
NetR4_1: R4.1 U2.27 | length 4.6
  Bottom Layer w0.203: U2.27 33.225,19.465 33.225,19.914 33.365,20.054 34.669,20.054 35.25,20.636 35.25,21.433 35.662,21.844 R4.1
NetR9_2: R9.2 U1.1 | length 1.9
  Bottom Layer w0.457: U1.1 15.21,13.305 15.651,13.746 15.681,13.746 15.722,13.788 R9.2
NetR15_2: R15.2 R16.1 U4.44 | length 7.8
  Top Layer w0.203: U4.44 21.133,15.1 21.133,13.868 21.946,13.056 23.774,13.056 24.866,11.964 R15.2 R16.1
NetU4_2: U4.2 U.12 | length 17.8
  Top Layer w0.203: U4.2 26.511,16.916 26.613,17.018 26.67,16.961 v1(26.67,16.815) ; v1(34.493,22.911) 35.059,22.345 35.059,19.832 34.784,19.557 U.12
  Middle Layer 2 w0.203: v1(26.67,16.815) 30.175,16.815 34.493,21.133 v1(34.493,22.911)
PPM: P12.1 U2.9 U4.38 | length 18
  Top Layer w0.203: U4.38 18.117,15.865 18.47,16.219 18.478,16.219 18.694,16.435 v1(18.694,17.628) ; v1(27.737,12.751) 27.737,12.09 P12.1
  Middle Layer 2 w0.203: v1(18.694,17.628) 18.802,17.628 18.95,17.479 18.995,17.479 23.165,13.31 26.975,13.31 27.534,12.751 v1(27.737,12.751)
  Bottom Layer w0.203: v1(27.737,12.751) 28.868,12.751 29.203,13.086 29.203,13.809 U2.9
Reset: P9.1 R1.2 U2.31 | length 7.3
  Top Layer w0.203: P9.1 35.103,12.751 v1(35.611,13.259)
  Bottom Layer w0.203: U2.31 34.041,17.127 34.638,17.127 35.001,16.764 35.001,14.91 35.29,14.621 35.463,14.621 35.611,14.473 R1.2@35.611,14.3 ; v1(35.611,13.259) 35.662,13.31 35.662,14.3 R1.2
RF_N: C7.2 U2.24 | length 1.6
  Bottom Layer w0.203: U2.24 31.714,20.638 31.976,20.9 C7.2
RF_P: C10.2 U2.23 | length 1.6
  Bottom Layer w0.203: C10.2 30.967,20.904 31.133,20.738 31.133,20.697 31.214,20.616 U2.23
SCL: R20.2 U4.30 U.23 | length 18.6
  Top Layer w0.203: R20.2 14.935,19.98 15.451,19.464 15.492,19.464 15.541,19.416 U4.30 18.394,19.416 18.485,19.507 v1(18.593,19.507) ; v1(25.857,16.307) 25.908,16.256 28.651,16.256 29.952,17.557 U.23
  Middle Layer 2 w0.203: v1(18.593,19.507) 18.669,19.431 18.669,19.227 18.989,18.907 18.989,18.703 21.385,16.307 v1(25.857,16.307)
SDA: R19.2 U4.31 U.24 | length 19.4
  Top Layer w0.203: R19.2 14.188,20.498 14.356,20.329 14.356,20.086 15.478,18.964 15.492,18.964 15.541,18.916 17.093,18.916 17.248,19.071 18.071,19.071 18.454,18.688 v1(18.46,18.688) ; v1(25.857,15.545) 26.01,15.545 26.416,15.951 28.804,15.951 29.909,17.057 U.24
  Middle Layer 2 w0.203: v1(18.46,18.688) 18.567,18.688 18.736,18.52 18.741,18.52 21.716,15.545 v1(25.857,15.545)
USB_DM: U1.2 U4.32 | length 9.2
  Top Layer w0.203: U4.32 17.394,18.416 17.52,18.542 v1(17.628,18.542)
  Bottom Layer w0.203: U1.2 14.173,14.031 14.946,14.031 15.748,14.834 15.748,16.725 16.244,17.221 17.816,17.221 18.156,17.561 18.156,17.999 17.628,18.528 v1(17.628,18.542)
USB_DP: R10.2 U1.3 U4.33 | length 8
  Top Layer w0.203: U4.33 v1@17.385,17.916
  Bottom Layer w0.203: U1.3 15.088,14.605 15.429,14.946 15.429,16.899 16.586,18.056 R10.2 16.586,18.512 16.755,18.344 16.785,18.344 16.944,18.185 17.272,17.856 17.552,17.856 v1(17.628,17.78)
Vin: C28.1 C30.1 C33.1 C34.1 C35.1 P2.1 P3.1 P5.1 P6.1 P7.1 R9.1 U3.1 U3.3 | length 9.7
  Bottom Layer w0.203: U3.1@10.891,24.567 11.109,24.348 U3.1 ; U3.1@10.891,24.568 10.539,24.919 10.539,25.678 10.919,26.058 11.109,26.248 U3.3
  Bottom Layer w0.4: U3.1 12.251,24.348 13.492,23.107 13.492,23.1 13.658,22.934 C28.1 ; P7.1 12.07,22.422 13.1,22.422 13.543,22.864 13.565,22.864 C28.1@13.565,22.934
  Bottom Layer w0.508: R9.1 16.586,13.101 P5.1
XTAL1: C1.1 U2.21 X1.1 | length 8.2
  Bottom Layer w0.203: C1.1@26.894,26.205 27.568,25.531 27.568,24.266 28.371,23.463 28.371,21.613 29.512,20.472 29.715,20.472 30.203,19.985 30.203,19.465 U2.21
XTAL2: C2.1 U2.20 X1.3 | length 8.3
  Bottom Layer w0.203: C2.1 24.725,20.888 24.725,21.123 25.668,22.066 X1.3@25.868,22.066 ; X1.3@25.37,22.765 25.868,22.266 X1.3 X1.3@25.868,22.066 ; U2.20 29.703,19.465 29.703,20.027 29.563,20.168 29.321,20.168 28.356,21.133 26.56,21.133 26.36,21.333 26.36,21.575 X1.3@25.868,22.066
pads on no net: U1.4 U1.S1 U1.S2 U1.S3 U1.S4 U1.S5 U1.S6 U2. U2.1 U2.4 U2.5 U2.6 U2.7 U2.8 U2.11 U2.12 U2.13 U2.14 U2.18 U2.32 U2.33 U2.34 U2.35 U2.36 U2.V U4.4 U4.7 U4.10 U4.11 U4.14 U4.15 U4.16 U4.17 U4.18 U4.19 U4.20 U4.21 U4.22 U4.25 U4.26 U4.27 U4.28 U4.29 U4.37 U4.39 U4.40 U4.41 U4.42 U4.43 U.2 U.3 U.4 U.5 U.6 U.7 U.14 U.15 U.16 U.17 U.19 U.21 U.22

## Polygon pours and split planes (outlines as drawn)
Vin on Top Layer "VIN_L01_P004" (solid, pour order 4): 10,17.526 10,10.262 23.311,10.262 23.311,13.31 13.818,13.31 13.818,24.79 24.13,24.79 24.13,28.194 10,28.194 10,22.225
GND on Top Layer "GND_L01_P007" (solid, pour order 7): 10,10 10,30 42,30 42,10
GND on Bottom Layer "GND_L04_P010" (solid, pour order 10): 10,10 10,28 42,28.448 42,10
GND on Middle Layer 1 "GND_L02_P008" (solid, pour order 8): 10,10 10,30 42,30 42,10
GND on Middle Layer 2 "GND_L03_P009" (solid, pour order 9): 28.95,20.32 34.696,20.32 34.696,28 28.95,28
3V on Middle Layer 2 "3V_L03_P011" (solid, pour order 11): 10,10 10,30 42,30 42,10

## Keep-outs
Keep-Out Layer:
  the board outline again, w0.254

## Silkscreen, mask and mechanical layers (free items; w line width, h text height)
Top Overlay:
  text "V1.0" at 33.172,26.873 h0.8 r180
  text "MiniFrogFC" at 35.712,25.539 h0.8 r180
  text "+" at 23.985,25.444 h1
  text "+" at 19.362,25.241 h1
  text "+" at 12.762,22.947 h1
  text "-" at 13.548,18.143 h1 r90
  text "C" at 32.529,12.596 h0.8
  text "D" at 30.381,12.55 h0.8
  text "S" at 28.314,12.495 h0.8
  text "R" at 34.771,12.49 h0.8
  text "+" at 15.959,11.728 h1
  text "+" at 20.632,11.728 h1
Bottom Overlay:
  text "31.2mm" at 32.106,27.127 h0.8 r180
  text "+" at 24.341,23.666 h1
  text "+" at 19.108,23.615 h1
  text "+" at 10.371,22.498 h1
  text "-" at 11.109,19.007 h1 r90
  text "-" at 24.776,13.382 h1
  text "G" at 28.852,12.347 h0.8
  text "3V" at 35.71,12.296 h0.8
  text "+" at 15.044,11.779 h1

## Text inside footprints (layer, text, board x,y; h text height)
U1: Mechanical 13 "PCB EDGE" at 10.042,19.021 h0.41 r270
U2: Mechanical 13 "*" at 32.829,13.983 h1.27 r270